# EAGLE board follower 2015-3 (EAGLE 6.3)
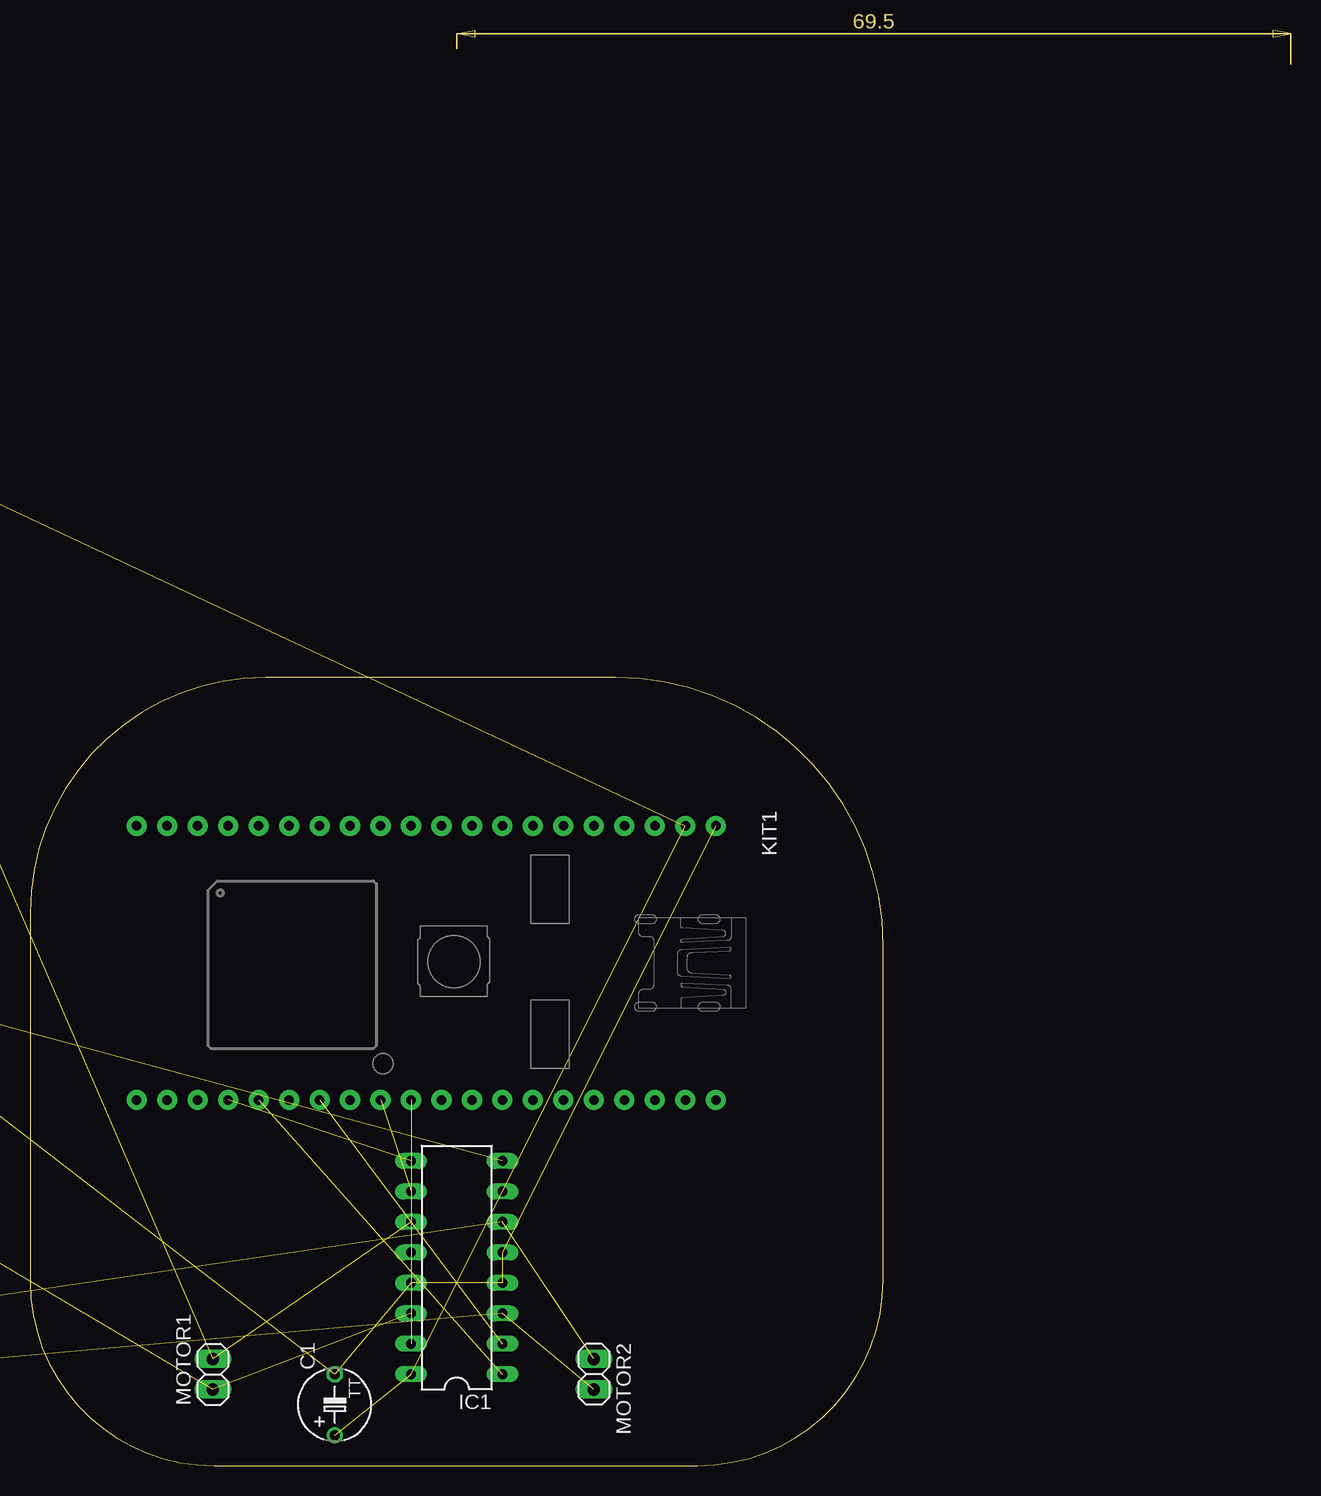
[diagram p0: board, top side]
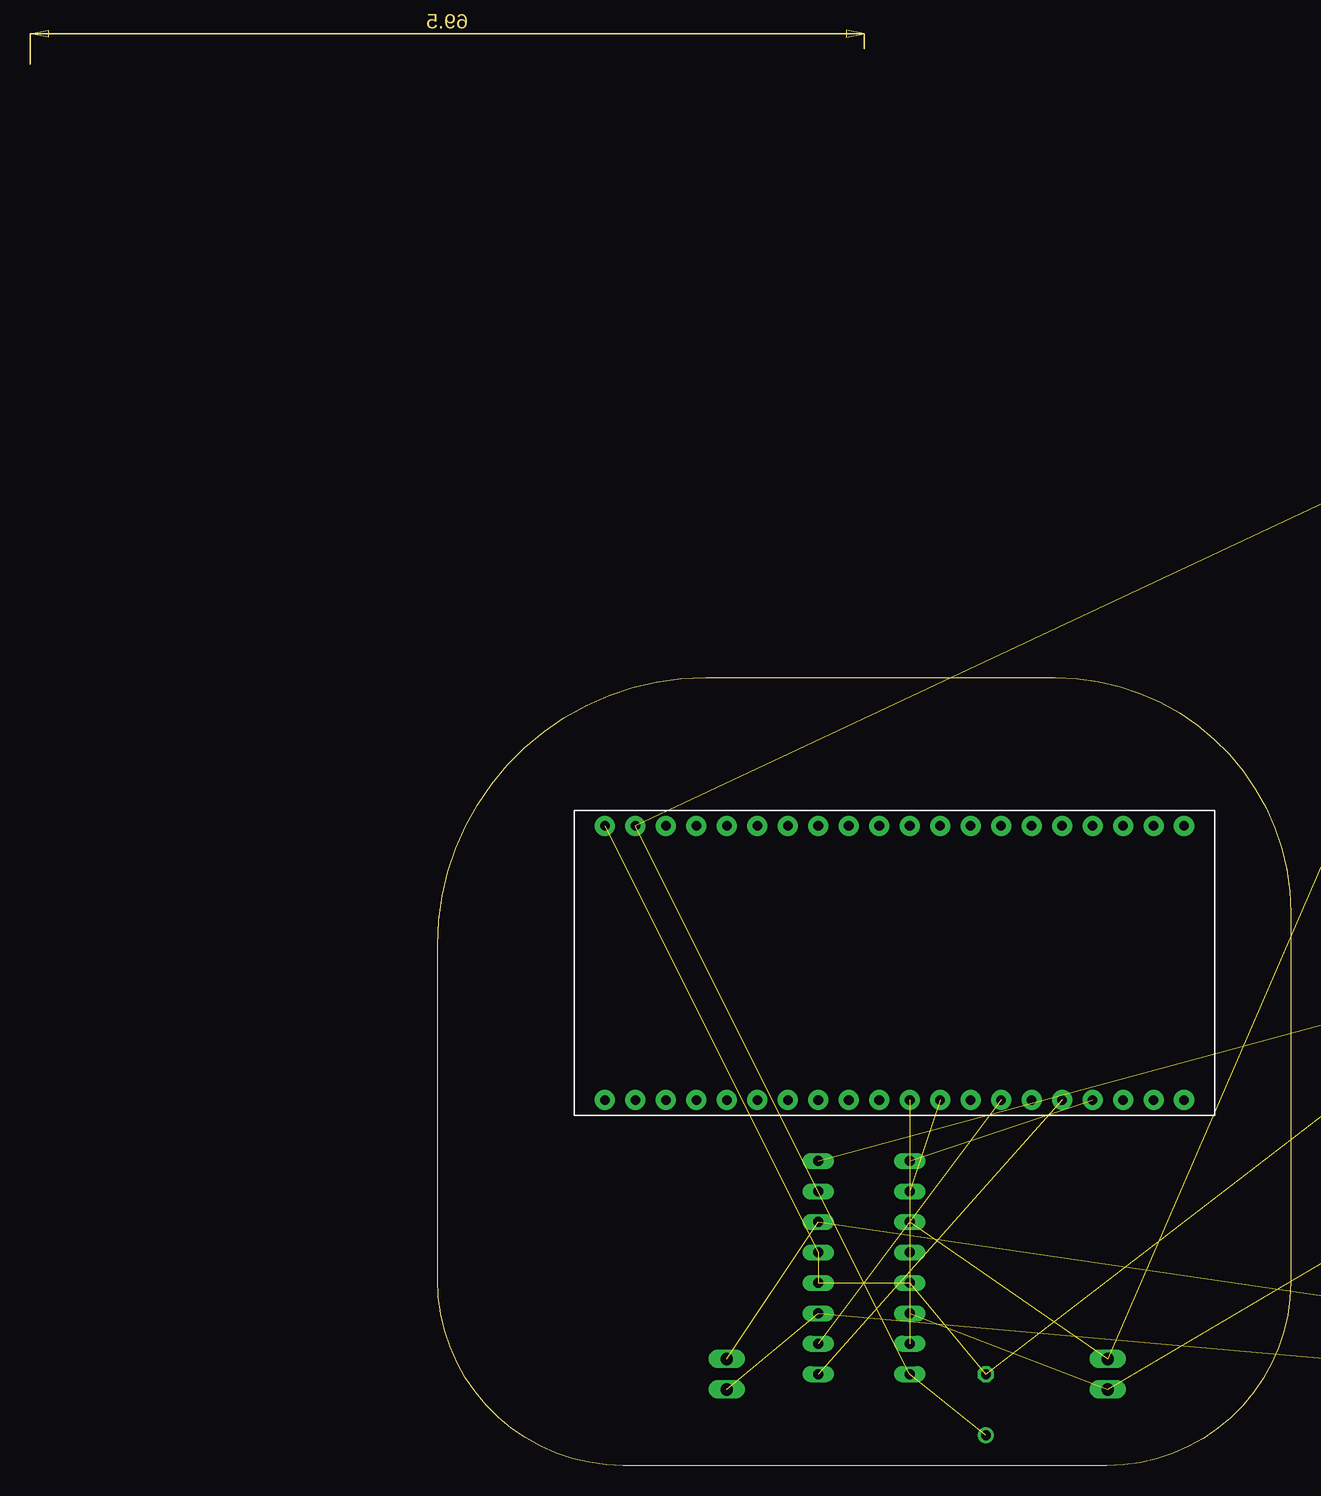
[diagram p1: board, bottom side, seen from below]

Size 71.1 x 65.71 mm. Coordinates in mm from the lower left corner, seen from the top.
Outline: 0,46.08 0,15.34 arc90 15.35,0 55.61,0 arc90 71.1,15.49 71.1,43.37 arc90 48.76,65.71 19.63,65.71 arc90 0,46.08
Copper layers (1*16): Top 0.035mm / dielectric 1.5mm / Bottom 0.035mm
Design rules "default": minimum track width 10mil, minimum drill 24mil, track to track 8mil, track to pad 8mil, pad to pad 8mil, via to via 8mil, smd to smd 8mil, copper to edge 40mil, drill to drill 8mil, minimum pad ring 10mil, minimum via ring 8mil, stop-mask expansion 4mil, vias tented up to drill 0mil, thermal gap 10mil

## Footprints (pad centres in the part's own frame; a part is rotated, then mirrored left to right if it is on the bottom)
78XXL = drill 1.016 long: GND 0,-3.81; IN -2.54,-3.81; OUT 2.54,-3.81 | hole 3.302: 0,11.176
1X02 = drill 1.016 long: 1 -1.27,0; 2 1.27,0
TT5D6 = drill 0.813: + -2.54,0 | drill 0.813 octagon: - 2.54,0
DIL16 = drill 0.813 long: 1 -8.89,-3.81; 2 -6.35,-3.81; 3 -3.81,-3.81; 4 -1.27,-3.81; 5 1.27,-3.81; 6 3.81,-3.81; 7 6.35,-3.81; 8 8.89,-3.81; 9 8.89,3.81; 10 6.35,3.81; 11 3.81,3.81; 12 1.27,3.81; 13 -1.27,3.81; 14 -3.81,3.81; 15 -6.35,3.81; 16 -8.89,3.81
MBED-KIT = drill 0.8 pad 1.676: D+ 11.43,1.27; D- 11.43,3.81; GND -11.43,24.13; IF+ 11.43,16.51; IF- 11.43,19.05; NR -11.43,16.51; P$5 -11.43,13.97; P$6 -11.43,11.43; P$7 -11.43,8.89; P$8 -11.43,6.35; P$9 -11.43,3.81; P$10 -11.43,1.27; P$11 -11.43,-1.27; P$12 -11.43,-3.81; P$13 -11.43,-6.35; P$14 -11.43,-8.89; P$15 -11.43,-11.43; P$16 -11.43,-13.97; P$17 -11.43,-16.51; P$18 -11.43,-19.05; P$19 -11.43,-21.59; P$20 -11.43,-24.13; P$21 11.43,-24.13; P$22 11.43,-21.59; P$23 11.43,-19.05; P$24 11.43,-16.51; P$25 11.43,-13.97; P$26 11.43,-11.43; P$27 11.43,-8.89; P$28 11.43,-6.35; P$29 11.43,-3.81; P$30 11.43,-1.27; RD+ 11.43,11.43; RD- 11.43,13.97; TD+ 11.43,6.35; TD- 11.43,8.89; VB -11.43,19.05; VIN -11.43,21.59; VOUT 11.43,24.13; VU 11.43,21.59
LED3MM = drill 0.813 octagon: A -1.27,0; K 1.27,0
0204/5 = drill 0.813 octagon: 1 -2.54,0; 2 2.54,0
TSW-103-02-S-S-RA = drill 1 pad 1.5 octagon: 1 2.54,1.524; 2 0,1.524; 3 -2.54,1.524
TSW-111-02-S-S = drill 1 pad 1.5 octagon: 1 12.7,0; 2 10.16,0; 3 7.62,0; 4 5.08,0; 5 2.54,0; 6 0,0; 7 -2.54,0; 8 -5.08,0; 9 -7.62,0; 10 -10.16,0; 11 -12.7,0

## Placement (x,y rotation side)
5V  [78XXL]  -10.16,78.74 180 bottom  (outside the outline)
BAT7.4V  [1X02]  -17.78,54.61 270 top  (outside the outline)
C1  0.1 uF  [TT5D6]  25.4,5.08 90 top
C2  0.33 uF  [TT5D6]  -7.62,35.56 270 top  (outside the outline)
C3  0.1 uF  [TT5D6]  -15.24,12.7 180 top  (outside the outline)
C4  0.1 uF  [TT5D6]  -17.78,5.08 270 top  (outside the outline)
C5  0.1 uF  [TT5D6]  -7.62,55.88 0 bottom  (outside the outline)
C6  0.1 uF  [TT5D6]  -15.24,22.86 0 bottom  (outside the outline)
IC1  L293D  [DIL16]  35.56,16.51 90 top
KIT1  MBED_NXP_LPC1768  [MBED-KIT]  33.02,41.91 270 top
LED1  [LED3MM]  -17.78,34.29 270 top  (outside the outline)
MOTOR1  [1X02]  15.24,7.62 90 top
MOTOR2  [1X02]  46.99,7.62 270 top
R2  10k  [0204/5]  -17.78,40.64 90 top  (outside the outline)
X1  TSW-103-02-S-S-RA  [TSW-103-02-S-S-RA]  -16.51,-6.35 0 top  (outside the outline)
X2  TSW-111-02-S-S  [TSW-111-02-S-S]  -6.35,-21.59 0 top  (outside the outline)

## Library data of the parts
5V = v-reg
BAT7.4V MOTOR1 MOTOR2 = pinhead
C1-C6 = resistor
IC1 = st-microelectronics; MPN: L293D; OC_FARNELL: 9589619; OC_NEWARK: 56P8249
KIT1 = MBED_v2.1
LED1 = led
R2 = rcl
X1 X2 = con-samtec; OC_FARNELL: unknown; OC_NEWARK: unknown

## Nets
BATIN: BAT7.4V.2 C2.+ IC1.8 R2.2
GROUND: 5V.GND BAT7.4V.1 C1.- C2.- C3.- C4.- C5.- C6.- IC1.4 IC1.5 IC1.12 IC1.13 KIT1.GND LED1.K
MOTOR2: C4.+ IC1.3 MOTOR2.2
N$1: KIT1.P$5
N$2: IC1.15 KIT1.P$30
N$3: IC1.2 KIT1.P$27
N$4: IC1.1 KIT1.P$25
N$5: IC1.10 KIT1.P$29
N$6: IC1.7
N$7: KIT1.P$26
N$8: C3.+ IC1.6 MOTOR2.1
N$9: C5.+ IC1.11 MOTOR1.2
N$10: C6.+ IC1.14 MOTOR1.1
N$11: KIT1.P$6
N$12: KIT1.P$7
N$13: KIT1.P$8
N$14: KIT1.P$9
N$15: KIT1.P$10
N$16: KIT1.P$11
N$17: KIT1.P$12
N$18: KIT1.P$13
N$19: LED1.A R2.1
N$21: 5V.IN
N$22: IC1.9 KIT1.P$24
NR: KIT1.NR
VB: KIT1.VB
VIN5V: 5V.OUT C1.+ IC1.16 KIT1.VIN
VO: KIT1.VOUT
VU: KIT1.VU

## Tracks (layer width: path | path; a pad name or v marks a point on that pad's centre or on a via)
BATIN  (3 unrouted)
GROUND  (13 unrouted)
MOTOR2  (via drill 0.6)  (2 unrouted)
  other vias: -17.78,7.62
N$2  (1 unrouted)
N$3  (1 unrouted)
N$4  (1 unrouted)
N$5  (1 unrouted)
N$8  (2 unrouted)
N$9  (2 unrouted)
N$10  (2 unrouted)
N$19  (1 unrouted)
N$22  (1 unrouted)
VIN5V  (3 unrouted)